# Allegro board ASTABLE-MV.brd
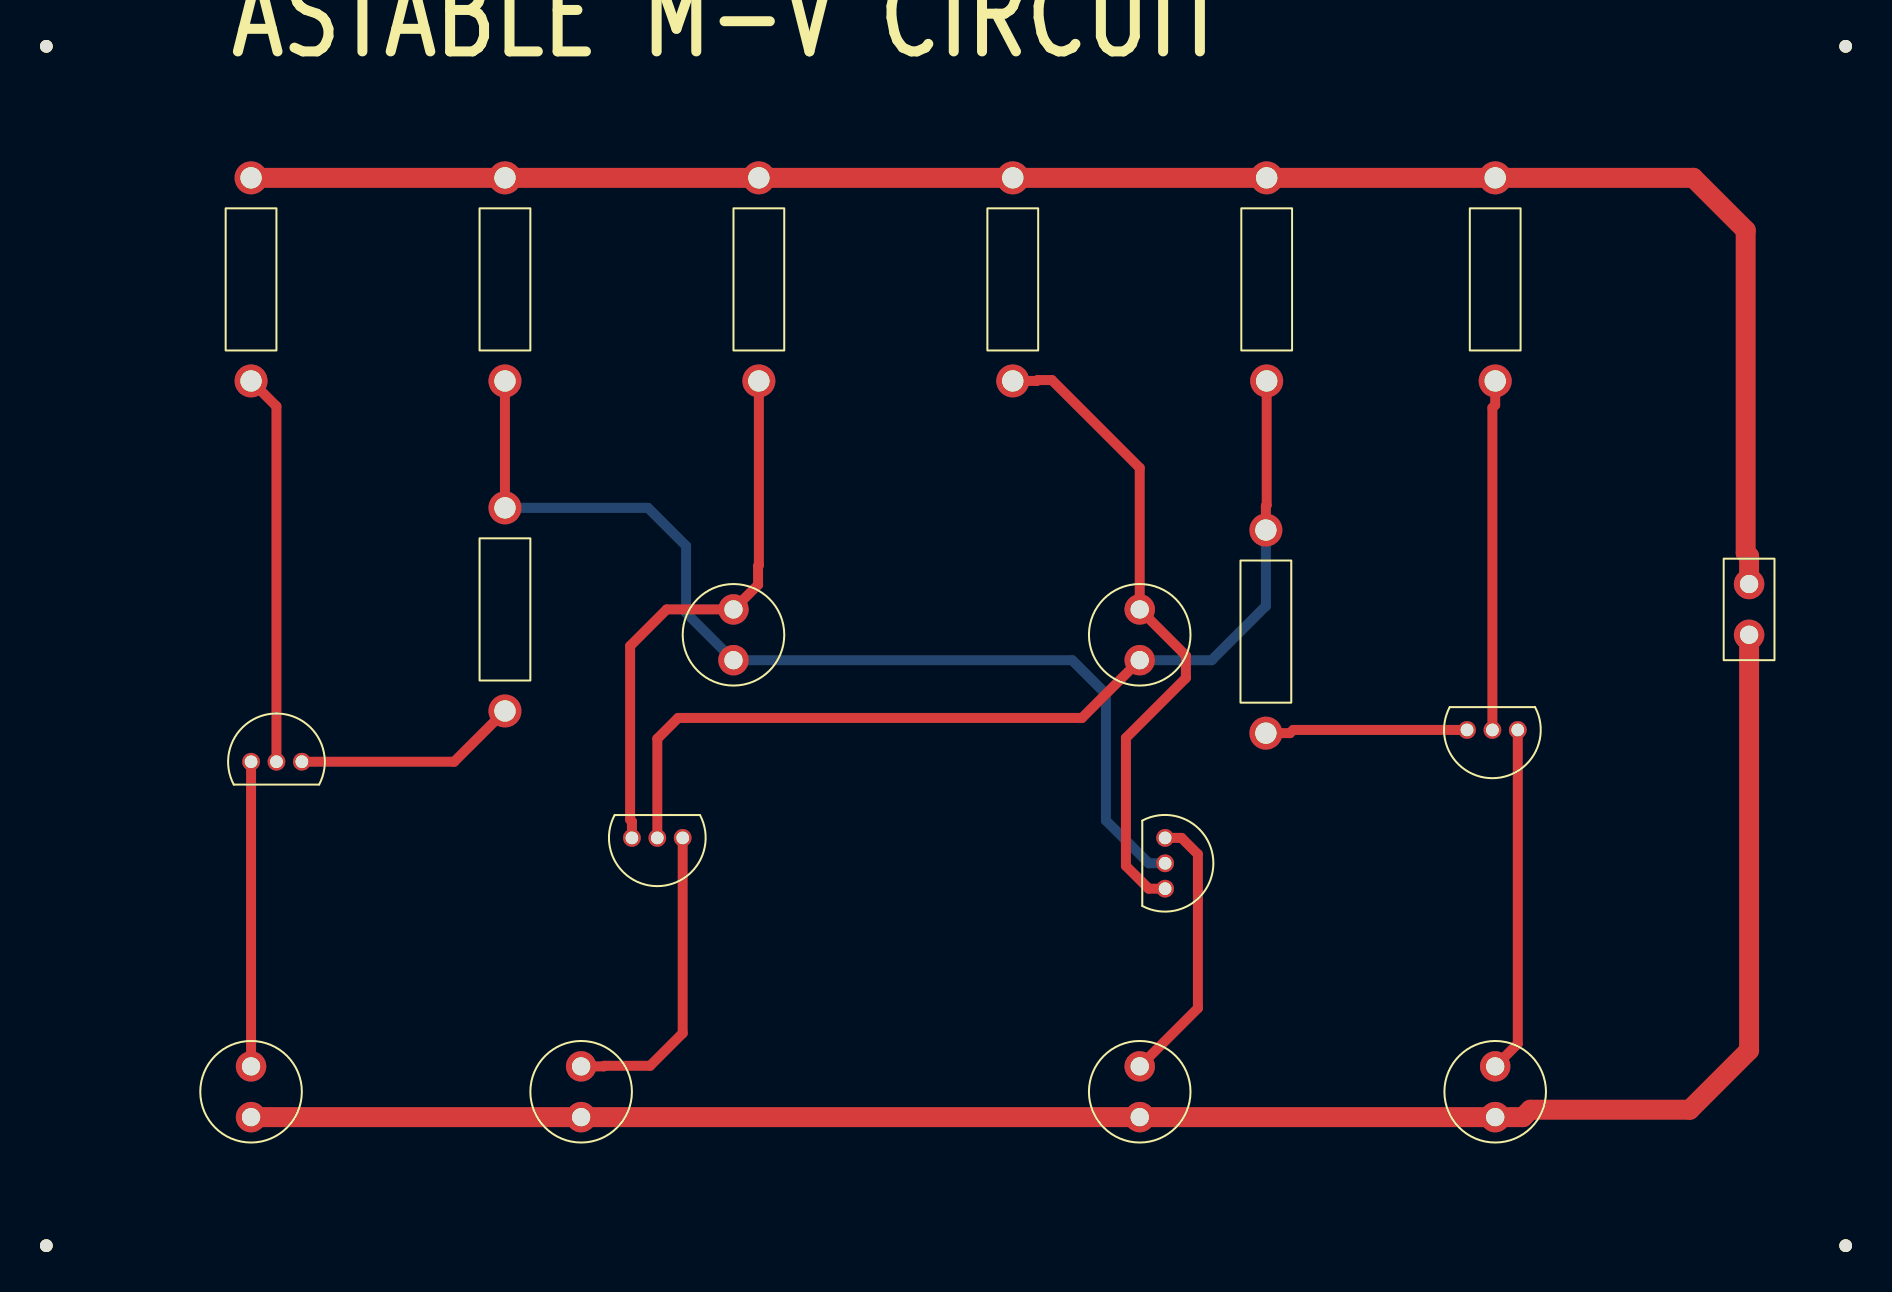
[diagram p0: board, top side]
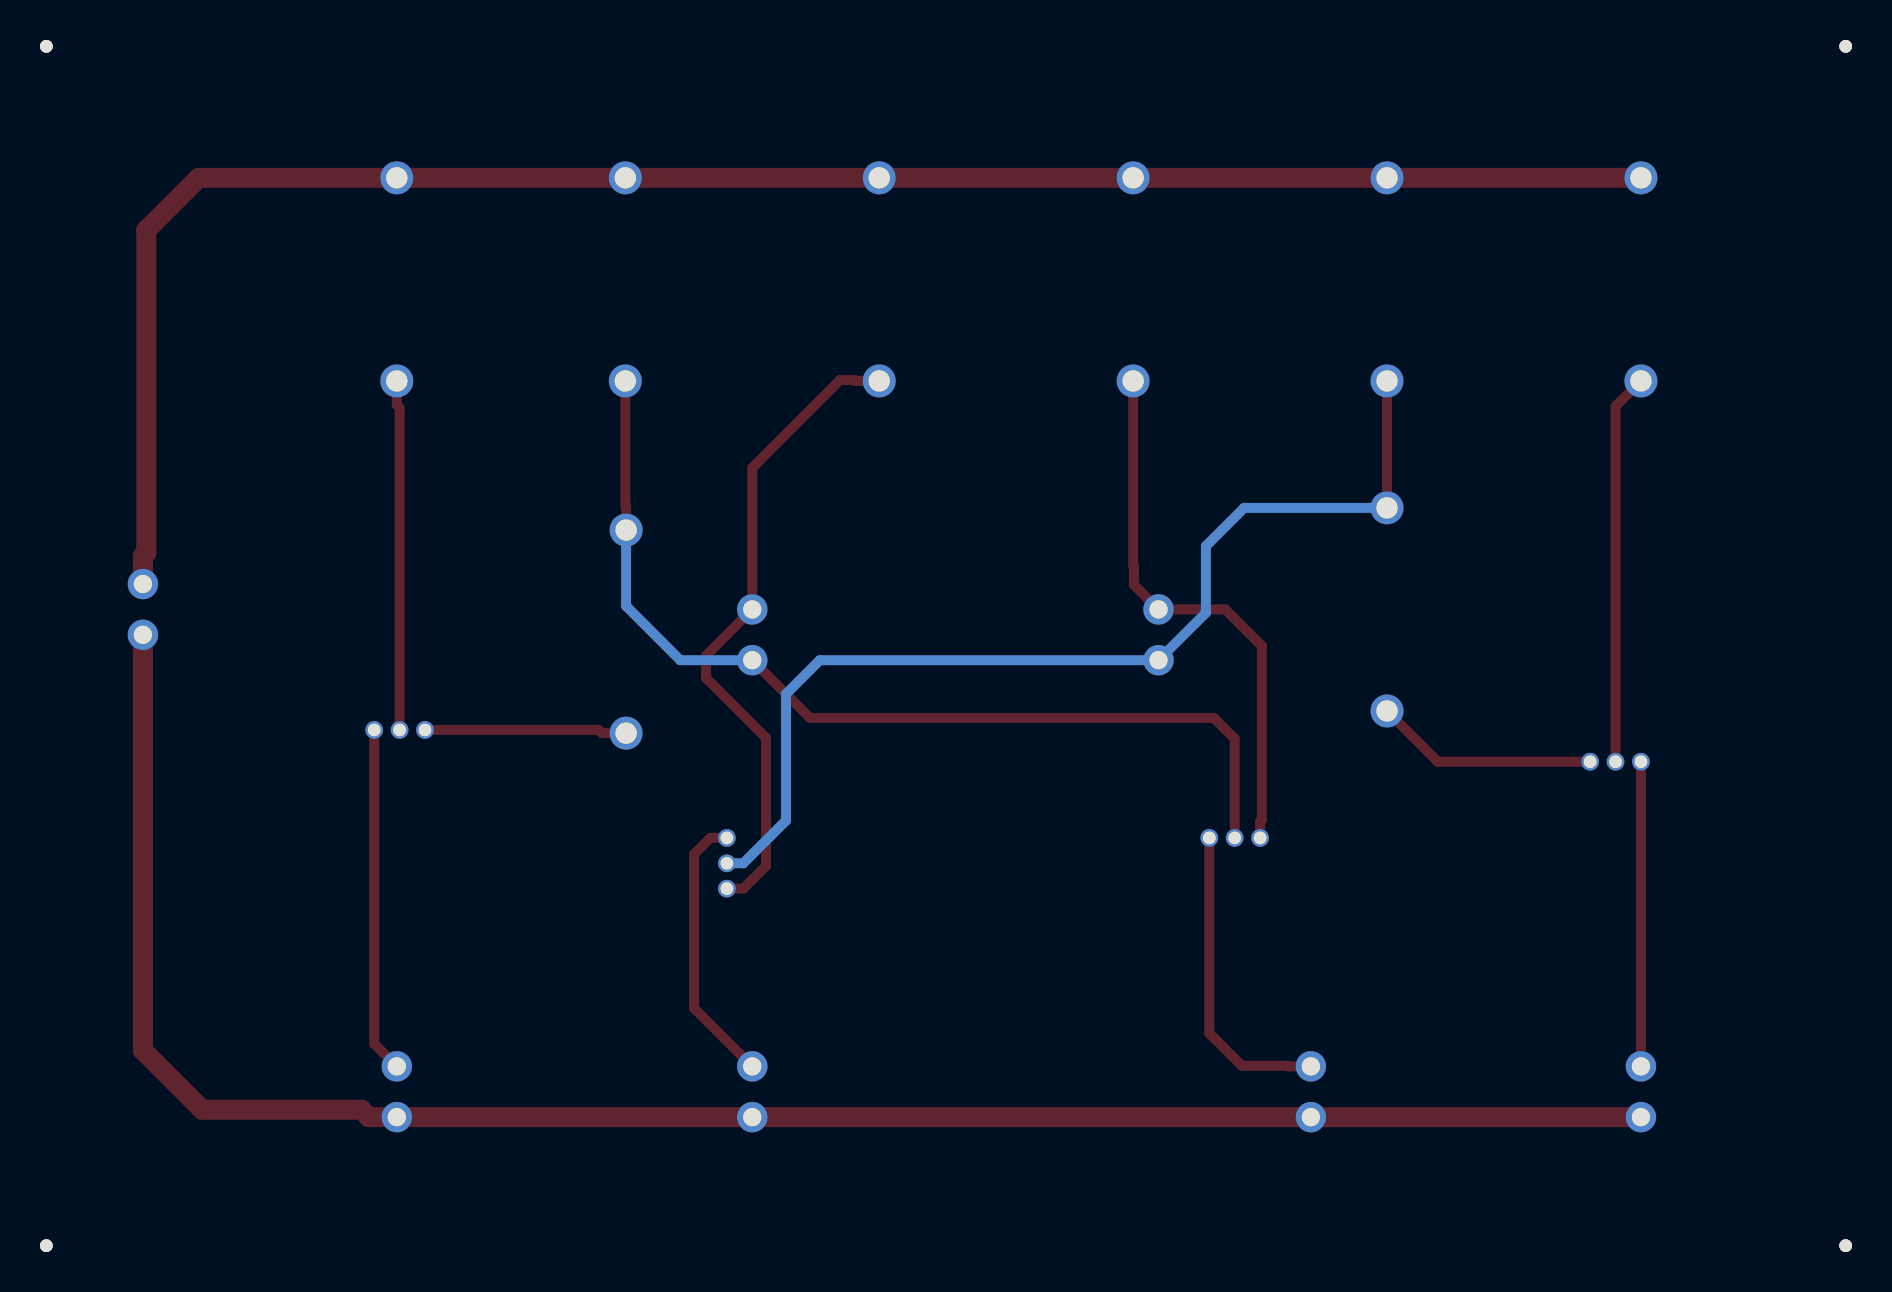
[diagram p1: board, bottom side, seen from below]

No outline. copper layers: TOP, BOTTOM. Coordinates in mm from the lowest, leftmost part position.

## Design rules (mm)
nets with their own width: min track width 1; nets +9V GND

## Placement (name value [footprint] x y rotation side)
BT1  +9V  [JUMPER2]  90.17 38.1 270 top
C1  33uF  [CAP196]  39.37 34.29 0 top
C2  33uF  [CAP196]  59.69 34.29 0 top
LED1  LED  [CAP196]  31.75 11.43 0 top
LED2  LED  [CAP196]  77.47 11.43 0 top
LED3  LED  [CAP196]  15.24 11.43 0 top
LED4  LED  [CAP196]  59.69 11.43 0 top
NOREF  -  []  95 65 0 top
NOREF#2  -  [unnamed#2]  95 5 0 top
NOREF#3  -  []  5 5 90 top
NOREF#4  -  []  5 65 0 top
NOREF#5  -  []  0 70 0 top
NOREF#6  -  []  0 0 90 top
NOREF#7  -  []  5 65 90 top
NOREF#8  -  [unnamed#2]  95 65 0 top
NOREF#9  -  []  0 67.31 0 top
NOREF#10  -  []  3.81 0 90 top
NOREF#11  -  [unnamed#2]  5 5 0 top
NOREF#12  -  [unnamed#2]  5 65 0 top
Q1  2SC1815  [TO92]  15.24 29.21 90 top
Q2  2SC1815  [TO92]  78.6 30.8 270 top
Q3  2SC1815  [TO92]  60.96 25.4 0 top
Q4  2SC1815  [TO92]  36.83 25.4 270 top
R1  470  [RES400]  15.24 58.42 180 top
R2  470  [RES400]  27.94 58.42 180 top
R3  33K  [RES400]  40.64 58.42 180 top
R4  33K  [RES400]  53.34 58.42 180 top
R5  470  [RES400]  66.04 58.42 180 top
R6  470  [RES400]  77.47 58.42 180 top
R7  1K  [RES400]  27.94 31.75 0 top
R8  1K  [RES400]  66 40.8 180 top

## Library data of the parts
BT1 = BATTERY: User Part Number: ***
C1 C2 = CAP POL: Tolerance: ***; User Part Number: ***
LED1-LED4 = LED: Tolerance: ***; User Part Number: ***
Q1-Q4 = NPN ECB
R1-R8 = RESISTOR: Tolerance: ***; User Part Number: ***

## Footprints (pads in the part's own frame, mm; a bottom-side part is the same pattern mirrored in y, then rotated)
CAP196
  round 1.524 hole 0.914: 1(0,0) 2(0,2.54)
JUMPER2
  round 1.524 hole 0.914: 1(0,0) 2(2.54,0)
RES400
  round 1.651 hole 1.067: 1(0,0) 2(0,10.16)
TO92
  round 0.889 hole 0.635: 1(0,0) 2(0,-1.27) 3(0,-2.54)
unnamed#2
  round 0.635 hole 3.175 unplated: (0,0)

## Nets
+9V: BT1.1(+) R1.1 R2.1 R3.1 R4.1 R5.1 R6.1
GND: BT1.2(-) LED1.1(CATHODE) LED2.1(CATHODE) LED3.1(CATHODE) LED4.1(CATHODE)
N00565: Q1.2(C) R1.2
N00569: LED3.2(ANODE) Q1.1(E)
N00615: C1.1 Q3.2(C) R2.2 R7.2
N00622: Q1.3(B) R7.1
N00641: LED4.2(ANODE) Q3.1(E)
N00658: C1.2 Q4.3(B) R3.2
N00665: C2.2 Q3.3(B) R4.2
N00672: C2.1 Q4.2(C) R5.2 R8.1
N00729: Q2.2(C) R6.2
N00738: LED2.2(ANODE) Q2.1(E)
N00742: Q2.3(B) R8.2
N00746: LED1.2(ANODE) Q4.1(E)

## Routing (per net, layer and track width the routed paths; a pad name or vN(x,y) marks a point on that pad's centre or on a via; arc(x,y) is an arc through that point)
+9V: length 93.6
  TOP w1: R1.1 R2.1 R3.1 R4.1 R5.1 R6.1 87.38,58.42 90,55.8 90,39.66 90.17,39.49 BT1.1
GND: length 97.1
  TOP w1: LED3.1 LED1.1 LED4.1 LED2.1 78.86,11.43 79.23,11.8 87.2,11.8 90.17,14.77 BT1.2
N00565: length 19.6
  TOP w0.5: R1.2 16.51,46.99 Q1.2
N00569: length 15.2
  TOP w0.5: Q1.1 LED3.2
N00615: length 52.4
  TOP w0.5: R7.2 R2.2
  BOTTOM w0.5: Q3.2 60.14,24.13 58,26.27 58,32.6 56.31,34.29 C1.1 37,36.66 37,40 35.09,41.91 R7.2
N00622: length 11.2
  TOP w0.5: Q1.3 25.4,29.21 R7.1
N00641: length 13.8
  TOP w0.5: LED4.2 62.6,16.88 62.6,24.58 61.78,25.4 Q3.1
N00658: length 27.5
  TOP w0.5: R3.2 40.64,39.04 40.6,39 40.6,38.06 C1.2 36.03,36.83 34.2,35 34.2,26.31 34.29,26.22 Q4.3
N00665: length 32.7
  TOP w0.5: R4.2 54.54,48.26 54.59,48.3 55.3,48.3 59.69,43.91 C2.2 62,34.52 62,33.4 59,30.4 59,24 60.14,22.86 Q3.3
N00672: length 49.4
  TOP w0.5: Q4.2 35.56,30.36 36.6,31.4 56.8,31.4 C2.1 ; R8.1 66,42 66.04,42.04 R5.2
  BOTTOM w0.5: R8.1 66,37 63.29,34.29 C2.1
N00729: length 17.5
  TOP w0.5: Q2.2 77.33,46.92 77.47,47.06 R6.2
N00738: length 17.3
  TOP w0.5: LED2.2 78.6,15.1 Q2.1
N00742: length 10.1
  TOP w0.5: Q2.3 67.36,30.8 67.2,30.64 R8.2
N00746: length 15.5
  TOP w0.5: LED1.2 32.89,13.97 32.92,14 35.2,14 36.83,15.63 Q4.1

## Text on the board
Ref Des/Silkscreen Top: ASTABLE M-V CIRCUIT
DIMENSION: FIGURE | SIZE | 0.635 | 0.914 | 1.067 | 3.175 | DRILL CHART: TOP to BOTTOM | ALL UNITS ARE IN MILLIMETERS | PLATED | NON-PLATED | QTY | 12 | 14 | 16 | 4
